# EAGLE board Verteiler (EAGLE 8.3.2)
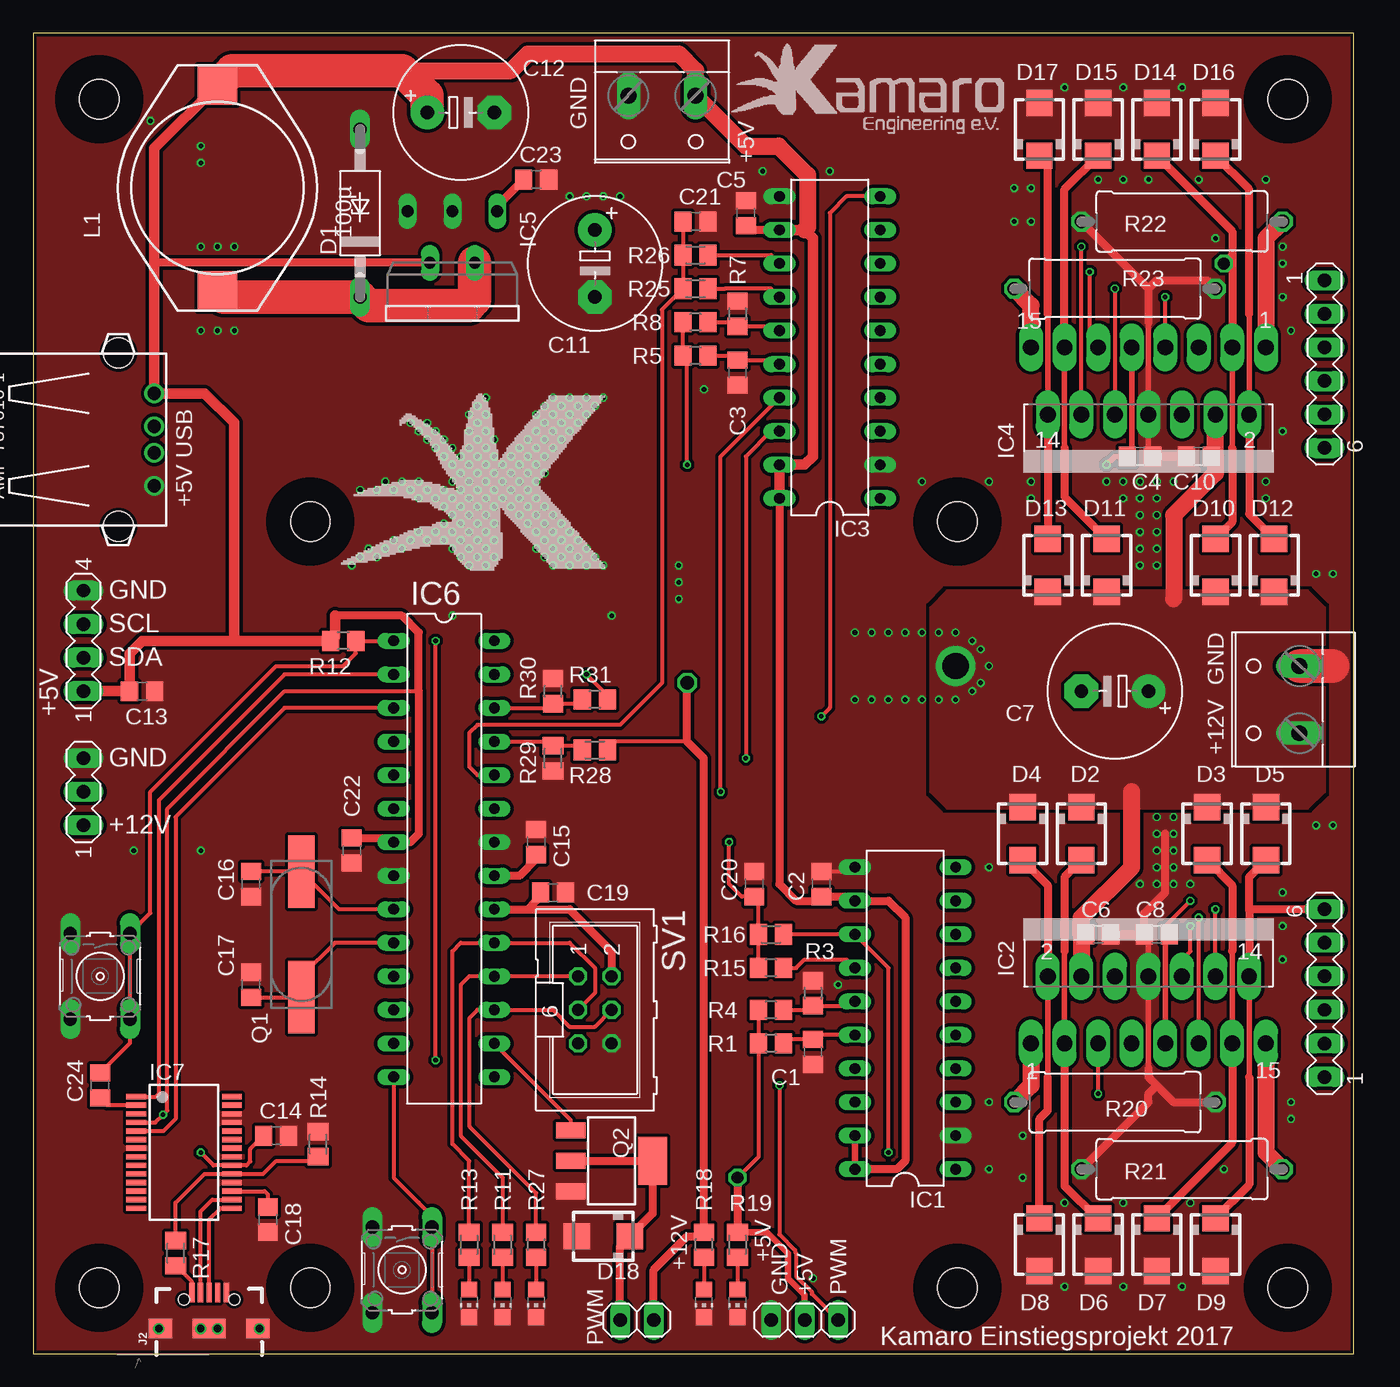
[diagram p0: board, top side]
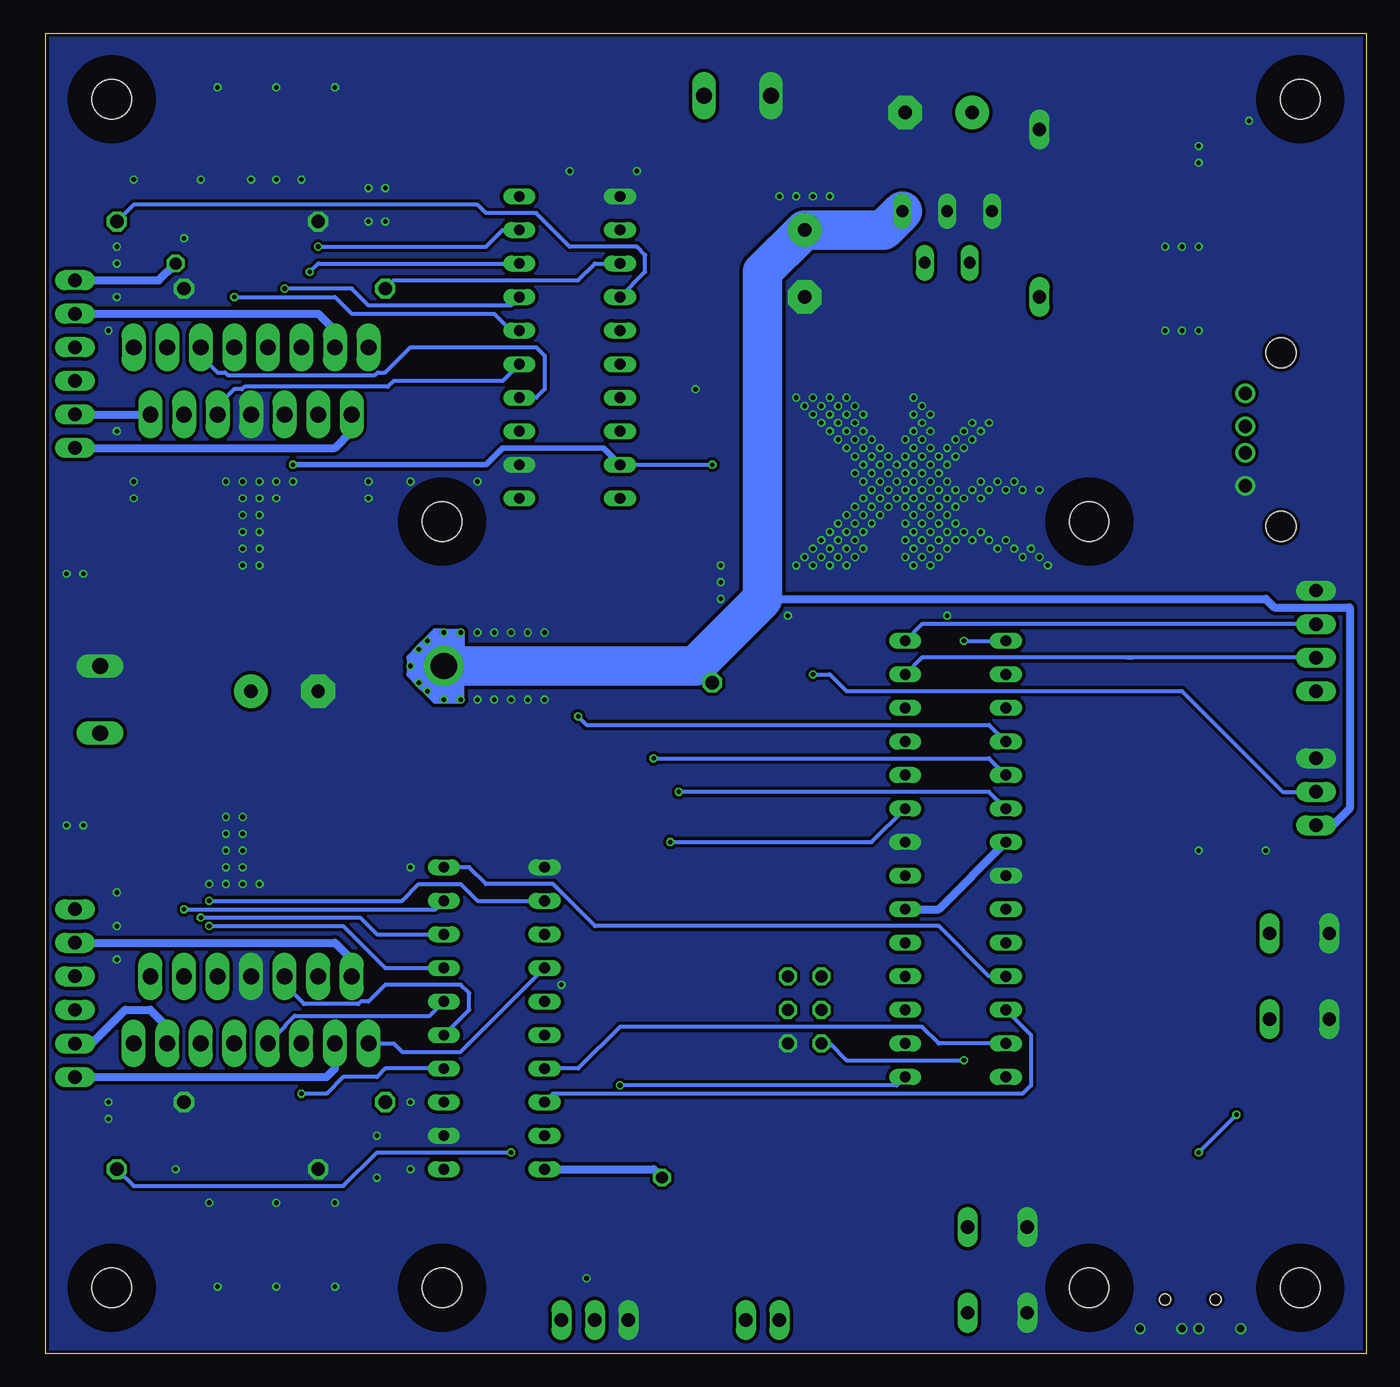
[diagram p1: board, bottom side, seen from below]

Size 100 x 100 mm. Coordinates in mm from the lower left corner, seen from the top.
Outline: 0,0 100,0 100,100 0,100 0,0
Copper layers (1*16): Top 0.018mm / dielectric 1.55mm / Bottom 0.018mm
Design rules "eC_2Layer_PClass6_BaseCopperO18_eCDefault *": minimum track width 0.15mm, minimum drill 0.35mm, track to track 0.15mm, track to pad 0.15mm, pad to pad 0.15mm, via to via 0.15mm, smd to smd 0mil, copper to edge 0.25mm, drill to drill 0.35mm, minimum pad ring 0.175mm, minimum via ring 0.125mm, stop-mask expansion 0mil, vias tented up to drill 0.45mm, thermal gap 0.2mm
Holes 3 mm at 5,5 95,5 95,95 5,95 21,5 70,5 70,63 21,63
tRestrict: area 18,60 to 24,66; area 2,92 to 8,98; area 92,92 to 98,98; area 2,2 to 8,8; area 18,2 to 24,8; area 67,2 to 73,8; area 92,2 to 98,8; area 67,60 to 73,66
bRestrict: area 2,2 to 8,8; area 92,2 to 98,8; area 92,92 to 98,98; area 2,92 to 8,98; area 18,2 to 24,8; area 67,2 to 73,8; area 67,60 to 73,66; area 18,60 to 24,66

## Footprints (pad centres in the part's own frame; a part is rotated, then mirrored left to right if it is on the bottom)
C0805 = smd 1.3 x 1.5: 1 -0.95,0; 2 0.95,0
E5-10,5 = drill 1.016 pad 2.54: + -2.54,0 | drill 1.016 pad 2.54 octagon: - 2.54,0
F126Z12 = drill 1.016 long: A 6.35,0; C -6.35,0
SMA = smd 2 x 2: A 2,0; C -2,0
DIL20 = drill 0.813 long: 1 -11.43,-3.81; 2 -8.89,-3.81; 3 -6.35,-3.81; 4 -3.81,-3.81; 5 -1.27,-3.81; 6 1.27,-3.81; 7 3.81,-3.81; 8 6.35,-3.81; 9 8.89,-3.81; 10 11.43,-3.81; 11 11.43,3.81; 12 8.89,3.81; 13 6.35,3.81; 14 3.81,3.81; 15 1.27,3.81; 16 -1.27,3.81; 17 -3.81,3.81; 18 -6.35,3.81; 19 -8.89,3.81; 20 -11.43,3.81
MULTIWATT-15 = drill 1.2 long: 1 -8.89,-7.62; 2 -7.62,-2.54; 3 -6.35,-7.62; 4 -5.08,-2.54; 5 -3.81,-7.62; 6 -2.54,-2.54; 7 -1.27,-7.62; 8 0,-2.54; 9 1.27,-7.62; 10 2.54,-2.54; 11 3.81,-7.62; 12 5.08,-2.54; 13 6.35,-7.62; 14 7.62,-2.54; 15 8.89,-7.62
TO220-5 = drill 0.9 long: 1 -3.4,-8.4; 2 -1.7,-4.5; 3 0,-8.4; 4 1.7,-4.5; 5 3.4,-8.4
DIL28-3 = drill 0.813 long: 1 -16.51,-3.81; 2 -13.97,-3.81; 3 -11.43,-3.81; 4 -8.89,-3.81; 5 -6.35,-3.81; 6 -3.81,-3.81; 7 -1.27,-3.81; 8 1.27,-3.81; 9 3.81,-3.81; 10 6.35,-3.81; 11 8.89,-3.81; 12 11.43,-3.81; 13 13.97,-3.81; 14 16.51,-3.81; 15 16.51,3.81; 16 13.97,3.81; 17 11.43,3.81; 18 8.89,3.81; 19 6.35,3.81; 20 3.81,3.81; 21 1.27,3.81; 22 -1.27,3.81; 23 -3.81,3.81; 24 -6.35,3.81; 25 -8.89,3.81; 26 -11.43,3.81; 27 -13.97,3.81; 28 -16.51,3.81
SSOP28 = smd 0.4 x 1.5: 1 -4.225,-3.625; 2 -3.575,-3.625; 3 -2.925,-3.625; 4 -2.275,-3.625; 5 -1.625,-3.625; 6 -0.975,-3.625; 7 -0.325,-3.625; 8 0.325,-3.625; 9 0.975,-3.625; 10 1.625,-3.625; 11 2.275,-3.625; 12 2.925,-3.625; 13 3.575,-3.625; 14 4.225,-3.625; 15 4.225,3.625; 16 3.575,3.625; 17 2.925,3.625; 18 2.275,3.625; 19 1.625,3.625; 20 0.975,3.625; 21 0.325,3.625; 22 -0.325,3.625; 23 -0.975,3.625; 24 -1.625,3.625; 25 -2.275,3.625; 26 -2.925,3.625; 27 -3.575,3.625; 28 -4.225,3.625
USB-B-MICRO-SMD = smd 1.45 x 0.4: D+ 2.725,0; D- 2.725,0.65; GND 2.725,-1.3; ID 2.725,-0.65; VBUS 2.725,1.3 | smd 1.5 x 1.8: SHIELD1 0,3.685; SHIELD2 0,-3.685 | smd 1.5 x 2.5: SHIELD3 0,0 | hole 0.85: 2.2,1.9; 2.2,-1.9
1X02 = drill 1.016 long: 1 -1.27,0; 2 1.27,0
1X03 = drill 1.016 long: 1 -2.54,0; 2 0,0; 3 2.54,0
PISR = smd 3 x 3: P$1 -7.8,0; P$2 7.8,0
CHIP-LED0805 = smd 1.2 x 1.2: A 0,-1.05; C 0,1.05
CSM-7X-DU = smd 5.5 x 2: 1 -4.75,0; 2 4.75,0
SOT223 = smd 1.219 x 2.235: 1 -2.311,-3.099; 2 0,-3.099; 3 2.311,-3.099 | smd 3.6 x 2.2: 4 0,3.099
R0805 = smd 1.3 x 1.5: 1 -0.95,0; 2 0.95,0
M0805 = smd 1.3 x 1.6: 1 -0.95,0; 2 0.95,0
P0613/15 = drill 1.016 octagon: 1 -7.62,0; 2 7.62,0
B3F-10XX = drill 1.016 long: 1 -3.251,2.261; 2 3.251,2.261; 3 -3.251,-2.261; 4 3.251,-2.261
ML6 = drill 0.914 octagon: 1 -2.54,-1.27; 2 -2.54,1.27; 3 0,-1.27; 4 0,1.27; 5 2.54,-1.27; 6 2.54,1.27
MA06-1 = drill 1.016 long: 1 -6.35,0; 2 -3.81,0; 3 -1.27,0; 4 1.27,0; 5 3.81,0; 6 6.35,0
MA04-1 = drill 1.016 long: 1 -3.81,0; 2 -1.27,0; 3 1.27,0; 4 3.81,0
MA03-1 = drill 1.016 long: 1 -2.54,0; 2 0,0; 3 2.54,0
USB = drill 1: 1 -3.5,12.99; 2 -1,12.99; 3 1,12.99; 4 3.5,12.99 | hole 2.3: -6.57,10.28; 6.57,10.28
W237-132 = drill 1.194 long: 1 -2.54,-0.635; 2 2.54,-0.635

## Placement (x,y rotation side)
C1  3n3  [C0805]  59.05,22.86 270 top
C2  100n  [C0805]  59.69,35.56 90 top
C3  3n3  [C0805]  53.34,74.3 270 top
C4  100n  [C0805]  83.82,67.94 0 top
C5  100n  [C0805]  53.98,86.36 90 top
C6  100n  [C0805]  80.64,31.75 0 top
C7  1000u  [E5-10,5]  81.92,50.16 180 top
C8  100n  [C0805]  85.09,31.75 180 top
C10  100n  [C0805]  88.27,67.94 180 top
C11  100u  [E5-10,5]  42.55,82.55 270 top
C12  1000u  [E5-10,5]  32.38,93.98 0 top
C13  100nF  [C0805]  8.26,50.16 0 top
C14  100nF  [C0805]  18.41,16.51 0 top
C15  100n  [C0805]  38.1,38.73 90 top
C16  27pF  [C0805]  16.51,35.56 90 top
C17  27pF  [C0805]  16.51,27.94 270 top
C18  100nF  [C0805]  17.78,10.16 270 top
C19  100nF  [C0805]  39.37,34.92 0 top
C20  100nF  [C0805]  54.61,35.56 90 top
C21  100nF  [C0805]  50.16,85.72 0 top
C22  100nF  [C0805]  24.13,38.1 270 top
C23  100n  [C0805]  38.1,88.9 0 top
C24  100nF  [C0805]  5.08,20.32 90 top
D1  [F126Z12]  24.77,86.36 90 top
D2  S1M  [SMA]  79.38,39.37 270 top
D3  S1M  [SMA]  88.9,39.37 270 top
D4  S1M  [SMA]  74.93,39.37 270 top
D5  S1M  [SMA]  93.34,39.37 270 top
D6  S1M  [SMA]  80.64,8.26 270 top
D7  S1M  [SMA]  85.09,8.26 270 top
D8  S1M  [SMA]  76.2,8.26 270 top
D9  S1M  [SMA]  89.53,8.26 270 top
D10  S1M  [SMA]  89.53,59.69 90 top
D11  S1M  [SMA]  81.28,59.69 90 top
D12  S1M  [SMA]  93.98,59.69 90 top
D13  S1M  [SMA]  76.83,59.69 90 top
D14  S1M  [SMA]  85.09,92.71 90 top
D15  S1M  [SMA]  80.64,92.71 90 top
D16  S1M  [SMA]  89.53,92.71 90 top
D17  S1M  [SMA]  76.2,92.71 90 top
D18  S1M  [SMA]  43.18,8.89 180 top
IC1  L297  [DIL20]  66.04,25.4 90 top
IC2  L298  [MULTIWATT-15]  84.45,31.11 0 top
IC3  L297  [DIL20]  60.33,76.2 90 top
IC4  L298  [MULTIWATT-15]  84.45,68.58 180 top
IC5  LM2576T  [TO220-5]  31.75,78.11 180 top
IC6  MEGA8-P  [DIL28-3]  31.11,37.47 270 top
IC7  FT232RL  [SSOP28]  11.43,15.24 270 top
J2  [USB-B-MICRO-SMD]  13.34,1.91 90 top
JP1  [1X02]  45.72,2.54 180 top
JP2  [1X03]  58.42,2.54 180 top
L1  100µ  [PISR]  13.97,88.27 90 top
LED1  rot  [CHIP-LED0805]  50.8,3.81 180 top
LED2  grün  [CHIP-LED0805]  53.34,3.81 180 top
LED6  rot  [CHIP-LED0805]  33.02,3.81 180 top
LED7  gelb  [CHIP-LED0805]  35.56,3.81 180 top
LED8  grün  [CHIP-LED0805]  38.1,3.81 180 top
Q1  20Mhz  [CSM-7X-DU]  20.32,31.75 90 top
Q2  N-HEXFET-2D_SOT232-IRLL014N  [SOT223]  43.81,14.61 270 top
R1  22K  [R0805]  55.88,23.5 180 top
R3  2K0  [R0805]  59.05,27.3 270 top
R4  51K  [R0805]  55.88,26.04 180 top
R5  22K  [R0805]  50.16,75.56 180 top
R7  2K0  [R0805]  53.34,78.74 270 top
R8  51K  [R0805]  50.16,78.11 180 top
R11  470  [M0805]  35.56,8.26 90 top
R12  10k  [R0805]  23.5,53.98 180 top
R13  470  [M0805]  33.02,8.26 90 top
R14  10k  [M0805]  21.59,15.88 270 top
R15  10k  [R0805]  55.88,29.21 180 top
R16  10k  [M0805]  55.88,31.75 180 top
R17  4k7  [M0805]  10.79,7.62 270 top
R18  4k7  [R0805]  50.8,8.26 90 top
R19  470  [M0805]  53.34,8.26 90 top
R20  0R1  [P0613/15]  81.92,19.05 0 top
R21  0R1  [P0613/15]  87,13.97 180 top
R22  0R1  [P0613/15]  87,85.72 180 top
R23  0R1  [P0613/15]  81.92,80.64 0 top
R25  10k  [M0805]  50.16,80.64 180 top
R26  10k  [M0805]  50.16,83.19 180 top
R27  470  [R0805]  38.1,8.26 90 top
R28  10k  [M0805]  42.55,45.72 180 top
R29  4k7  [M0805]  39.37,45.09 270 top
R30  4k7  [R0805]  39.37,50.16 90 top
R31  10k  [R0805]  42.55,49.53 180 top
S1  [B3F-10XX]  5.08,28.57 270 top
S2  [B3F-10XX]  27.94,6.35 270 top
SV1  [ML6]  42.55,26.04 270 top
SV2  [MA06-1]  97.79,27.3 90 top
SV3  [MA06-1]  97.79,74.93 270 top
SV4  [MA04-1]  3.81,53.98 90 top
SV5  [MA03-1]  3.81,42.55 90 top
X1  [USB]  -3.81,69.22 270 top
X3  [W237-132]  95.25,49.53 90 top
X4  [W237-132]  47.62,94.61 180 top

## Library data of the parts
C1-C8 C10-C12 C23 R1 R3-R5 R7 R8 R11-R23 R25-R31 = resistor
C13-C22 C24 = rcl
D1-D18 = diode
IC1 IC3 = st-microelectronics; MPN: L297/1; OC_FARNELL: 1094209; OC_NEWARK: 56P8258
IC2 IC4 = st-microelectronics; MPN: L298N; OC_FARNELL: 1589425; OC_NEWARK: 32M1527
IC5 = v-reg-3
IC6 = atmel; OC_FARNELL: unknown; OC_NEWARK: unknown
IC7 = ftdichip; MPN: FT232RL; OC_FARNELL: 1146032; OC_NEWARK: 91K9918
J2 = SparkFun-Connectors; PROD_ID: CONN-11752
JP1 JP2 = pinhead
L1 = L-PISR
LED1 LED2 LED6-LED8 = led
Q1 = crystal; OC_FARNELL: unknown; OC_NEWARK: unknown
Q2 = transistor-power
S1 S2 = switch-omron; MPN: B3F-1000; OC_FARNELL: 176432; OC_NEWARK: 36M3542
SV1 = con-harting-ml; OC_FARNELL: unknown; OC_NEWARK: unknown
SV2-SV5 = con-lstb; OC_FARNELL: unknown; OC_NEWARK: unknown
X1 = con-amp
X3 X4 = con-wago-508; OC_FARNELL: unknown; OC_NEWARK: unknown

## Nets
+5V: C2.1 C4.1 C5.1 C8.1 C12.+ C13.1 C14.1 C19.1 C22.1 IC1.12 IC1.19 IC1.20 IC2.9 IC3.12 IC3.19 IC3.20 IC4.9 IC5.4 IC6.7 IC6.20 IC7.4 IC7.20 JP2.2 L1.P$2 R1.2 R4.2 R5.2 R8.2 R12.2 R19.2 SV1.2 SV4.1 X1.1 X4.1
+12V: C6.1 C7.+ C10.1 C11.+ C23.1 D2.C D3.C D4.C D5.C D10.C D11.C D12.C D13.C IC2.4 IC4.4 IC5.1 JP1.1 R18.2 R28.1 SV5.1 X3.1
D+: IC7.15 J2.D+
D-: IC7.16 J2.D-
GND: C1.2 C2.2 C3.2 C4.2 C5.2 C6.2 C7.- C8.2 C10.2 C11.- C12.- C13.2 C14.2 C15.2 C16.1 C17.1 C18.2 C19.2 C20.2 C21.2 C22.2 C23.2 D1.A D6.A D7.A D8.A D9.A D14.A D15.A D16.A D17.A D18.A IC1.2 IC1.11 IC2.8 IC3.2 IC3.11 IC4.8 IC5.3 IC5.5 IC6.8 IC6.22 IC7.7 IC7.18 IC7.21 IC7.25 IC7.26 J2.GND J2.SHIELD1 J2.SHIELD2 J2.SHIELD3 JP2.3 LED1.C LED2.C LED6.C LED7.C LED8.C Q2.3 R3.1 R7.1 R14.1 R20.2 R21.2 R22.2 R23.2 R29.2 R30.2 S1.3 S1.4 S2.3 S2.4 SV1.6 SV4.4 SV5.3 X1.4 X3.2 X4.2
L_CLOCK: IC1.18 IC6.12
L_CW/CCW: IC1.17 IC6.13
L_ENABLE: IC1.10 IC6.11
LED5: IC6.14 S2.1 S2.2
MISO: IC6.18 R11.2 SV1.1
MOSI: IC6.17 R27.2 SV1.4
N$1: C1.1 IC1.16 R1.1
N$2: IC1.4 IC2.5
N$3: IC1.6 IC2.7
N$4: IC1.7 IC2.10
N$5: C3.1 IC3.16 R5.1
N$6: IC3.6 IC4.7
N$7: IC1.9 IC2.12
N$8: LED8.A R27.1
N$9: C21.1 IC6.24 R25.2 R26.2
N$10: IC1.5 IC2.6
N$11: IC1.15 R3.2 R4.1
N$12: D4.A D8.C IC2.2 SV2.5
N$14: IC3.4 IC4.5
N$15: IC3.7 IC4.10
N$16: IC3.9 IC4.12
N$17: IC3.15 R7.2 R8.1
N$19: IC3.5 IC4.6
N$20: IC1.8 IC2.11
N$22: C15.1 IC6.21
N$23: D2.A D6.C IC2.3 SV2.1
N$24: D3.A D7.C IC2.13 SV2.2
N$25: D5.A D9.C IC2.14 SV2.6
N$26: IC3.8 IC4.11
N$27: J2.VBUS R17.2
N$28: C16.2 IC6.9 Q1.2
N$29: D1.C IC5.2 L1.P$1
N$30: D10.A D14.C IC4.3 SV3.1
N$31: IC6.25 R28.2 R29.1
N$32: D12.A D16.C IC4.2 SV3.5
N$33: D13.A D17.C IC4.14 SV3.6
N$34: D11.A D15.C IC4.13 SV3.2
N$35: C17.2 IC6.10 Q1.1
N$36: IC7.19 R14.2 R17.1
N$37: C18.1 IC7.17
N$38: C20.1 IC6.23 R15.2 R16.2
N$39: LED1.A R18.1
N$40: LED2.A R19.1
N$42: LED6.A R13.1
N$43: LED7.A R11.1
N$44: R31.1 SV5.2
N$45: C24.1 IC7.2
N$46: D18.C JP1.2 Q2.2 Q2.4
N$47: IC6.16 Q2.1
N$48: IC6.15 JP2.1
R_CLOCK: IC3.18 IC6.5
R_CW/CCW: IC3.17 IC6.6
R_ENABLE: IC3.10 IC6.4
RESET: C24.2 IC6.1 R12.1 S1.1 S1.2 SV1.5
RX: IC6.2 IC7.1
SCK: IC6.19 R13.2 SV1.3
SCL: IC6.28 SV4.3
SDA: IC6.27 SV4.2
SENS1_L: IC1.14 IC2.1 R15.1 R20.1
SENS1_R: IC3.14 IC4.1 R22.1 R25.1
SENS2_L: IC1.13 IC2.15 R16.1 R21.1
SENS2_R: IC3.13 IC4.15 R23.1 R26.1
TX: IC6.3 IC7.5
US1: IC6.26 R30.1 R31.2

## Tracks (layer width: path | path; a pad name or v marks a point on that pad's centre or on a via)
+5V  (via drill 0.35, 0.9)
  Top 0.305: C14.1 16.46,15.5 16.46,14.55 16.17,14.27 IC7.20 13.68,14.27 v12.7,15.24 | 54.93,25.93 R4.2 | 54.93,25.93 R1.2 54.93,14.93 v53.34,13.34 | R8.2 R5.2 49.53,75.25 v49.53,67.31 | 85.72,31.43 85.72,32.38 v87.63,34.29 | 54.83,26.04 54.93,25.93 | IC7.4 9.26,17.52 v9.84,18.1 10.16,18.41 10.16,41.27 19.05,50.16 29.21,50.16
  Top 0.406: IC4.9 83.19,68.26 C4.1 81.92,67.94 v81.28,67.31 | IC2.9 85.72,31.43 C8.1
  Top 0.508: IC1.20 IC1.19 | R12.2 22.86,54.29 | R19.2 55.56,9.21 57.15,7.62 57.15,5.71 58.42,4.45 JP2.2
  Top 0.61: IC6.20 37.47,33.66 | 37.47,33.66 38.1,34.29 38.1,34.6 C19.1 | 37.47,33.66 40.64,33.66 43.81,30.48 SV1.2 | v53.34,13.34 R19.2 53.66,9.21 | IC1.20 65.41,13.97 66.04,14.61 66.04,33.02 64.77,34.29 IC1.12 61.91,34.61 C2.1 59.37,34.29 57.78,34.29 56.52,35.56 IC3.20 | 22.86,55.88 27.94,55.88 29.21,54.61 29.21,50.16 29.21,39.37 28.57,38.73 IC6.7 26.99,39.05 C22.1 | IC5.4 9.23,82.61 9.18,82.55 | IC3.12 54.3,85.09 C5.1
  Top 0.813: SV4.1 C13.1 7.3,53.02 8.26,53.98 15.24,53.98 | IC3.12 58.42,85.09 59.05,84.45 59.05,67.94 58.42,67.31 IC3.19 IC3.20 | L1.P$2 9.18,91.28 9.18,82.55 X1.1 13.01,72.72 15.24,70.48 15.24,53.98 | 22.86,55.88 22.86,54.29 | 15.24,53.98 R12.2
  Top 1.27: 27.94,97.16 36.2,97.16 37.47,98.42 48.9,98.42 50.16,97.16 X4.1 53.98,91.44 56.46,91.44 58.65,89.25 58.65,85.32 58.42,85.09
  Top 2.54: C12.+ 29.84,95.25 27.94,97.16 15.06,97.16 L1.P$2
  Bottom 0.305: IC6.7 | v87.63,34.29 73.03,34.29 71.75,35.56 68.58,35.56 67.31,34.29 IC1.12 | IC3.19 v49.53,67.31 | v12.7,15.24 v9.84,18.1
  Bottom 0.406: v81.28,67.31 66.67,67.31 65.41,68.58 57.78,68.58 IC3.19
  Bottom 0.61: IC6.20 32.39,33.66 IC6.7 | IC1.20 53.98,13.97 v53.34,13.34
+12V  (via drill 0.35, 1, 2)
  Top 0.305: 50.48,8.89 R18.2 | 49.53,46.35 44.13,46.35 R28.1
  Top 0.61: IC5.1 35.15,86.9 C23.1 | R18.2 50.8,45.09 49.53,46.35 v49.53,50.8 | C6.1 79.4,31.75 79.38,31.77 | C10.1 89.53,67.94 | JP1.1 46.99,6.35 49.53,8.89 50.48,8.89
  Top 1.27: IC2.4 79.38,31.77 79.38,33.02 83.19,36.83 83.19,42.55 | IC4.4 89.53,67.94 89.53,66.67 86.36,63.5 86.36,57.15
  Bottom 0.61: v49.53,50.8 50.8,52.07 | 70.48,54.61 v69.85,54.61 v68.58,54.61 68.58,53.34 | 70.48,54.61 v71.12,53.98 v71.75,53.34 72.39,52.7 v72.39,52.07 72.39,51.44 v71.75,50.8 v71.12,50.16 70.48,49.53 v69.85,49.53 v68.58,49.53 68.58,50.8 | 70.48,54.61 70.48,53.98 | 45.72,57.15 7.62,57.15 6.99,56.52 1.27,56.52 1.27,41.27 2.54,40.01 SV5.1
  Bottom 1.016: 69.22,53.98 70.48,53.98 71.75,52.7 71.75,51.44 70.48,50.16 69.22,50.16
  Bottom 3: IC5.1 36.56,85.09 C11.+ 45.72,81.92 45.72,57.15 50.8,52.07 v69.85,52.07
  pour Top (isolate 0.254, no thermals): 96.52,57.78 69.22,57.78 67.94,56.52 67.94,42.55 69.22,41.27 96.52,41.27 97.79,42.55 97.79,56.52
D+
  Top 0.305: J2.D+ 13.34,10.16 14.19,11.02 IC7.15
D-
  Top 0.305: J2.D- 12.69,10.78 13.57,11.66 IC7.16
GND  (via drill 0.35, 0.55)
  Top 0.305: C2.2 61.91,36.51 IC1.11
  Top 0.406: 84.72,68 84.45,68.26 IC4.8 84.45,78.11 | C8.2 84.45,31.43 IC2.8 84.45,21.59
  Top 0.61: 84.45,80.64 84.45,78.11 | 84.45,80.64 85.09,81.28 88.9,81.28 R23.2 | R22.2 84.45,80.64 | 85.72,39.37 85.72,34.92 84.14,33.34 C8.2 C6.2 | 84.45,21.59 84.45,20.95 85.09,20.32 | 85.09,20.32 86.36,19.05 R20.2 | R21.2 84.45,19.05 84.45,19.69 85.09,20.32 | C10.2 C4.2 84.72,68
  Top 2.54: X3.2 98.42,52.07
  other vias: 60.96,27.94 15.24,83.82 13.97,83.82 12.7,83.82 12.7,91.44 12.7,90.17 44.45,87.63 43.81,55.88 40.64,87.63 8.89,93.34 41.91,87.63 43.18,87.63 15.24,77.47 13.97,77.47 12.7,77.47 72.39,13.97 72.39,19.05 72.39,36.83 31.75,55.88 12.7,38.1 7.62,38.1 67.31,66.04 72.39,66.04 74.3,85.72 74.3,88.27 83.82,35.56 85.09,35.56 86.36,35.56 87.63,35.56 86.36,36.83 85.09,36.83 85.09,38.1 85.09,39.37 85.09,40.64 86.36,40.64 86.36,39.37 86.36,38.1 82.55,11.43 78.11,11.43 87.63,11.43 82.55,5.08 87,5.08 78.11,5.08 95.25,19.05 95.25,17.78 67.31,49.53 66.04,49.53 64.77,49.53 63.5,49.53 62.23,49.53 62.23,54.61 63.5,54.61 64.77,54.61 66.04,54.61 67.31,54.61 83.82,59.69 85.09,59.69 85.09,60.96 85.09,62.23 83.82,62.23 83.82,63.5 85.09,63.5 85.09,64.77 83.82,64.77 83.82,60.96 86.36,66.04 85.09,66.04 83.82,66.04 82.55,66.04 82.55,64.77 81.28,66.04 93.34,66.04 93.34,64.77 75.56,66.04 75.56,64.77 80.64,88.9 82.55,88.9 84.45,88.9 88.27,88.9 93.34,88.9 74.93,16.51 74.93,13.34 90.17,13.97 75.56,85.72 75.56,88.27 94.61,80.01 94.61,82.55 94.61,83.82 94.61,32.38 94.61,34.92 89.53,84.45 82.55,95.89 78.11,95.89 87,95.89 97.16,59.05 98.42,59.05 97.16,40.01 98.42,40.01 59.05,5.71 55.24,89.53 60.33,89.53 50.8,73.03 43.18,72.39 41.91,72.39 41.91,71.12 31.75,68.58 31.11,67.94 42.55,71.75 41.27,71.75 40.64,71.12 40.01,70.48 40.64,69.85 41.27,70.48 40.01,69.22 39.37,69.85 38.73,70.48 39.37,71.12 40.01,71.75 40.64,72.39 39.37,72.39 38.1,71.12 38.1,69.85 38.73,69.22 38.1,68.58 37.47,67.94 36.83,67.31 36.2,66.67 35.56,66.04 34.92,65.41 34.29,64.77 33.66,65.41 34.29,66.04 34.92,66.67 35.56,67.31 36.2,67.94 36.83,68.58 37.47,69.22 39.37,68.58 38.73,67.94 38.1,67.31 37.47,66.67 36.83,66.04 36.2,65.41 38.1,66.04 37.47,65.41 36.83,64.77 36.2,64.14 36.83,63.5 37.47,64.14 38.1,64.77 38.73,64.14 38.1,63.5 37.47,62.87 38.1,62.23 38.73,62.87 39.37,63.5 40.01,62.87 39.37,62.23 38.73,61.59 38.1,60.96 39.37,60.96 40.01,61.59 40.64,62.23 41.27,61.59 41.91,60.96 34.29,62.23 33.02,62.23 31.75,62.23 30.48,62.23 31.11,62.87 31.75,63.5 32.38,62.87 33.02,63.5 32.38,64.14 31.75,64.77 31.11,64.14 30.48,64.77 29.21,64.77 28.57,65.41 27.3,65.41 26.04,65.41 24.77,65.41 26.67,66.04 27.94,66.04 29.21,66.04 29.84,65.41 31.11,65.41 31.75,66.04 32.38,65.41 33.02,64.77 33.66,64.14 34.29,63.5 34.92,64.14 35.56,64.77 34.92,62.87 33.66,62.87 34.92,61.59 33.66,61.59 32.38,61.59 31.11,61.59 29.84,61.59 28.57,61.59 27.3,61.59 25.4,60.96 26.67,60.96 27.94,60.96 29.21,62.23 28.57,70.48 29.84,70.48 29.21,69.85 30.48,69.85 29.84,69.22 31.11,69.22 30.48,68.58 31.75,67.31 32.38,67.94 32.38,66.67 33.02,67.31 33.66,66.67 33.02,66.04 34.29,67.31 34.92,67.94 34.29,68.58 33.66,67.94 33.02,68.58 33.66,69.22 33.02,69.85 33.66,70.48 34.29,69.85 34.92,69.22 33.02,71.12 33.66,71.75 34.29,71.12 34.29,72.39 24.13,59.69 24.77,60.33 26.04,60.33 31.75,60.96 32.38,60.33 33.02,60.96 33.66,60.33 33.02,59.69 34.29,59.69 34.92,60.33 34.29,60.96 39.37,59.69 40.64,59.69 41.91,59.69 43.18,59.69 41.27,60.33 40.01,60.33 40.64,60.96 48.9,57.15 48.9,58.42 48.9,59.69 42.55,60.33 38.73,71.75 38.73,60.33 38.73,66.67 94.61,29.84 95.25,77.47 94.61,69.85 13.97,1.91 12.7,1.91 9.53,1.91 17.14,1.91
  pour Bottom (isolate 0.254, rank 2, no thermals): 160.02,0 0,0 0,99.69 0,100.33 160.02,100.33
  pour Top (isolate 0.254, rank 2, no thermals): 160.02,0 -1.27,0 -1.27,100.33 160.02,100.33
L_CLOCK
  Bottom 0.305: IC6.12 25.4,24.13 25.4,20.32 26.04,19.68 61.59,19.68 IC1.18
L_CW/CCW
  Bottom 0.305: IC6.13 32.38,23.5 33.66,24.77 56.52,24.77 59.69,21.59 IC1.17
L_ENABLE
  Bottom 0.305: IC6.11 28.57,28.57 32.38,32.38 58.42,32.38 61.59,35.56 66.67,35.56 67.94,36.83 IC1.10
LED5
  Top 0.305: IC6.14 27.3,13.34 29.21,11.43 30.2,10.44 S2.1 S2.2
MISO
  Top 0.305: SV1.1 IC6.18 33.02,28.57 32.38,27.94 32.38,16.51 35.56,13.34 R11.2
MOSI
  Top 0.305: SV1.4 42.55,24.77 40.64,24.77 39.37,26.04 IC6.17 33.66,26.04 33.06,25.44 33.06,17.19 38.1,12.15 R27.2
N$1
  Top 0.305: IC1.16 59.38,24.13 C1.1 57.15,23.81 R1.1
N$2  (via drill 0.35)
  Top 0.305: v80.64,19.68 IC2.5
  Bottom 0.305: IC1.4 74.3,21.59 74.93,20.95 77.47,20.95 78.74,19.68 v80.64,19.68
N$3
  Bottom 0.305: IC2.7 81.85,24.83 81.85,24.89 81.14,25.6 70.92,25.6 IC1.6
N$4  (via drill 0.35)
  Top 0.305: IC2.10 87,29.84 87.63,30.48 v87.63,32.38
  Bottom 0.305: v87.63,32.38 77.47,32.38 74.3,29.21 IC1.7
N$5
  Top 0.305: R5.1 53.02,75.56 C3.1 56.2,75.25 IC3.16
N$6  (via drill 0.35)
  Top 0.305: IC4.7 v85.72,80.01
  Bottom 0.305: v85.72,80.01 78.11,80.01 76.83,78.74 66.04,78.74 64.77,77.47 IC3.6
N$7  (via drill 0.35)
  Top 0.305: IC2.12 v89.53,33.66
  Bottom 0.305: v89.53,33.66 70.48,33.66 IC1.9
N$8
  Top 0.305: R27.1 LED8.A
N$9
  Top 0.305: C21.1 R26.2 R25.2 47.62,79.06 47.62,50.8 44.45,47.62 33.66,47.62 33.02,46.99 33.02,44.45 33.66,43.81 IC6.24
N$10
  Bottom 0.305: IC1.5 67.94,26.04 67.94,27.3 68.58,27.94 74.3,27.94 75.56,26.67 76.14,26.67 76.34,26.47 80.45,26.47 81.28,27.3 81.28,27.94 IC2.6
N$11
  Top 0.305: R4.1 58.73,26.04 R3.2 61.91,26.36 IC1.15
N$12
  Top 0.406: IC2.2 76.83,20.95
  Top 0.61: D8.C 76.2,17.78 76.83,18.41 76.83,20.95 | D4.A 76.83,35.47 IC2.2
  Bottom 0.61: SV2.5 78.11,31.11 76.83,29.84 IC2.2
N$14
  Bottom 0.305: IC4.5 88.27,75.56 87,74.3 86.42,74.3 86.22,74.1 75.07,74.1 74.87,74.3 74.3,74.3 72.39,76.2 62.87,76.2 62.23,75.56 62.23,73.03 62.87,72.39 IC3.4
N$15  (via drill 0.35)
  Top 0.305: v81.92,80.64 IC4.10
  Bottom 0.305: IC3.7 64.77,79.38 75.56,79.38 76.83,80.64 v81.92,80.64
N$16  (via drill 0.35)
  Top 0.305: IC4.12 v79.38,83.82
  Bottom 0.305: v79.38,83.82 66.67,83.82 65.41,85.09 IC3.9
N$17
  Top 0.305: IC3.15 56.2,77.79 R7.2 53.02,78.11 R8.1
N$19
  Bottom 0.305: IC3.5 65.41,73.66 73.66,73.66 74.1,73.22 84.95,73.22 85.15,73.03 85.72,73.03 87,71.75 IC4.6
N$20  (via drill 0.35)
  Top 0.305: IC2.11 v88.27,33.02
  Bottom 0.305: v88.27,33.02 76.2,33.02 74.93,31.75 IC1.8
N$22
  Top 0.61: C15.1 38.1,37.47 36.83,36.2 IC6.21
N$23
  Top 0.406: 78.11,30.48 IC2.3
  Top 0.61: D6.C 80.64,10.16 78.11,12.7 IC2.3 | D2.A 78.11,36.1 78.11,30.48
  Bottom 0.61: SV2.1 78.74,20.95 78.11,21.59 IC2.3
N$24
  Top 0.406: 90.81,30.48 IC2.13
  Top 0.61: D3.A 90.81,35.47 90.81,30.48 | IC2.13 90.81,15.97 D7.C
  Bottom 0.61: SV2.2 96.52,23.5 93.98,26.04 92.08,26.04 90.81,24.77 IC2.13
N$25
  Top 0.406: 92.08,20.95 IC2.14
  Top 0.61: D9.C 92.08,12.79 92.08,20.95 | 92.08,33.57 IC2.14 | 92.08,33.57 92.08,36.1 D5.A | SV2.6 92.16,33.66 92.08,33.57
N$26  (via drill 0.35)
  Top 0.305: IC4.11 80.01,76.83 v80.01,81.92
  Bottom 0.305: v80.01,81.92 79.38,82.55 IC3.8
N$27
  Top 0.305: J2.VBUS 12.04,5.43 R17.2
N$28
  Top 0.305: C16.2 Q1.2 23.16,33.66 IC6.9
N$29
  Top 1.27: 14.43,80.01 L1.P$1
  Top 2.54: 14.43,80.01 D1.C 25.4,79.38 33.02,79.38 33.45,79.81 IC5.2
N$30  (via drill 0.9)
  Top 0.406: IC4.3 90.81,68.58
  Top 0.61: 90.81,68.58 90.81,62.96 D10.A | D14.C 90.81,85 90.81,83.19 | 90.81,83.19 IC4.3 | 90.81,83.19 v90.17,82.55
  Bottom 0.61: SV3.1 91.44,81.28 v90.17,82.55
N$31
  Top 0.305: IC6.25 39.05,46.35 R29.1 41.27,46.03 R28.2
N$32
  Top 0.406: IC4.2 92.08,78.74
  Top 0.61: IC4.2 92.08,63.59 D12.A | 92.08,78.74 92.08,88.17 D16.C
  Bottom 0.61: SV3.5 IC4.2
N$33
  Top 0.406: IC4.14 76.83,78.74
  Top 0.61: IC4.14 D13.A | 76.83,78.74 76.83,90.08 D17.C
  Bottom 0.61: SV3.6 78.11,68.58 76.83,69.85 IC4.14
N$34
  Top 0.406: 78.11,68.58 IC4.13
  Top 0.61: 78.11,68.58 78.11,64.86 D11.A | IC4.13 78.11,88.17 D15.C
  Bottom 0.61: SV3.2 79.38,78.74 78.11,77.47 IC4.13
N$35
  Top 0.305: C17.2 Q1.1 20.32,28.57 22.86,31.11 IC6.10
N$36
  Top 0.305: R17.1 10.79,11.43 12.98,13.62 IC7.19 17.43,13.62 18.41,14.61 21.27,14.61 R14.2
N$37
  Top 0.305: IC7.17 17.53,12.31 17.78,12.06 C18.1
N$38  (via drill 0.35)
  Top 0.305: R15.2 R16.2 54.93,34.29 C20.1 53.66,34.61 52.7,35.56 v52.7,38.73
  Bottom 0.305: v52.7,38.73 37.47,38.73 IC6.23
N$39
  Top 0.305: R18.1 LED1.A
N$40
  Top 0.305: R19.1 LED2.A
N$42
  Top 0.305: R13.1 LED6.A
N$43
  Top 0.305: R11.1 LED7.A
N$44  (via drill 0.35)
  Top 0.305: R31.1 43.49,49.85 v41.91,51.44
  Bottom 0.305: v41.91,51.44 40.64,51.44 39.37,50.16 13.97,50.16 6.35,42.55 SV5.2
N$45
  Top 0.305: IC7.2 5.63,18.82 C24.1
N$46
  Top 0.305: 45.01,8.72 D18.C
  Top 0.61: JP1.2 44.45,8.16 45.01,8.72 46.91,10.62 Q2.4 Q2.2
N$47
  Top 0.305: IC6.16 40.72,17.7 Q2.1
N$48  (via drill 0.35)
  Top 0.305: v56.52,20.32 56.52,9.04 57.71,7.85 57.71,7.7 57.78,7.62 57.78,5.87 58.98,4.67 58.98,4.52 JP2.1
  Bottom 0.305: IC6.15 35.56,20.32 v56.52,20.32
R_CLOCK  (via drill 0.35)
  Top 0.305: IC3.18 55.88,69.85 53.98,67.94 v53.98,45.09
  Bottom 0.305: v53.98,45.09 28.57,45.09 IC6.5
R_CW/CCW  (via drill 0.35)
  Top 0.305: v52.07,42.55 52.07,67.94 IC3.17
  Bottom 0.305: IC6.6 28.57,42.55 v52.07,42.55
R_ENABLE  (via drill 0.35)
  Top 0.305: IC3.10 61.59,87.63 60.33,86.36 60.33,48.9 v59.69,48.26
  Bottom 0.305: v59.69,48.26 59.05,47.62 28.57,47.62 IC6.4
RESET  (via drill 0.35)
  Top 0.305: IC6.1 R12.1 24.45,53.02 23.5,52.07 18.41,52.07 8.89,42.55 8.89,33.38 S1.1 S1.2 7.34,23.53 C24.2 | v30.48,22.23 v30.48,53.98
  Bottom 0.305: SV1.5 40.64,23.5 39.37,22.23 v30.48,22.23 | v30.48,53.98 IC6.1
RX
  Top 0.305: IC6.2 19.05,51.44 9.53,41.91 9.53,19.68 9.3,19.46 IC7.1
SCK
  Top 0.305: R13.2 33.02,14.61 31.75,15.88 31.75,30.48 32.38,31.11 IC6.19 40.64,31.11 42.55,29.21 42.55,27.3 SV1.3
SCL
  Bottom 0.305: IC6.28 33.66,55.24 SV4.3
SDA
  Bottom 0.305: 18.1,52.7 17.78,52.7 | 18.1,52.7 33.66,52.7 IC6.27 | SV4.2 18.1,52.7
SENS1_L
  Top 0.305: R15.1 57.78,29.21 58.42,29.84 61.59,29.84 IC1.14
  Top 1.27: IC2.1 75.56,20.32 R20.1
  Bottom 0.305: IC2.1 73.66,23.5 73.03,22.86 68.58,22.86 IC1.14
SENS1_R
  Top 0.305: R25.1 52.43,80.64 52.45,80.67 55.85,80.67 IC3.14
  Top 1.27: IC4.1 93.34,84.45 R22.1
  Bottom 0.305: IC3.14 54.61,81.92 54.61,83.19 55.24,83.82 60.33,83.82 62.87,86.36 66.67,86.36 67.31,87 93.34,87 R22.1
SENS2_L  (via drill 0.35)
  Top 0.305: R16.1 IC1.13 64.77,29.21 v64.77,15.24
  Top 1.27: IC2.15 93.34,15.24 R21.1
  Bottom 0.305: v64.77,15.24 74.93,15.24 77.47,12.7 93.34,12.7 R21.1
SENS2_R
  Top 0.305: R26.1 55.88,83.19 IC3.13
  Top 1.27: IC4.15 75.56,79.38 R23.1
  Bottom 0.305: R23.1 73.66,81.28 59.69,81.28 58.42,82.55 IC3.13
TX
  Top 0.305: IC6.3 19.05,48.9 10.79,40.64 10.79,17.78 9.88,16.86 IC7.5
US1
  Top 0.305: IC6.26 39.05,48.9 R30.1 41.28,49.22 R31.2

## Text on the board
tNames: GND | +5V | +5V USB | GND | SCL | GND | SDA | +12V | +5V | GND | +12V | +5V | +12V | GND | +5V | PWM | PWM | Kamaro Einstiegsprojekt 2017